# EAGLE board driverMotor (EAGLE 7.1.0)
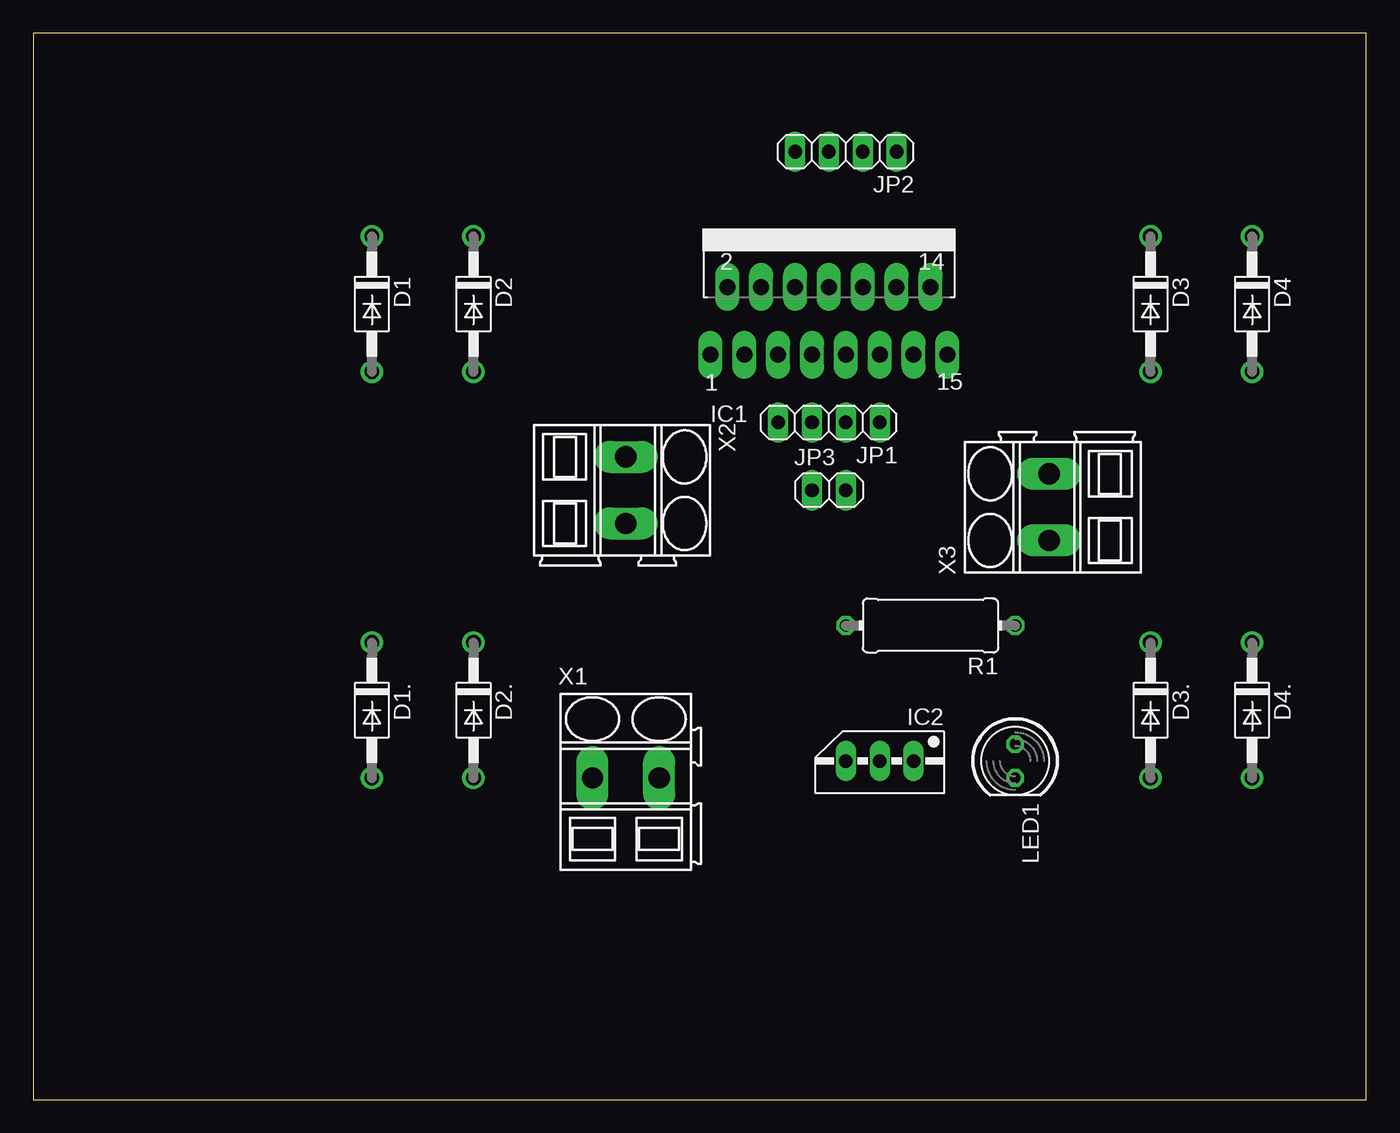
[diagram p0: board, top side]
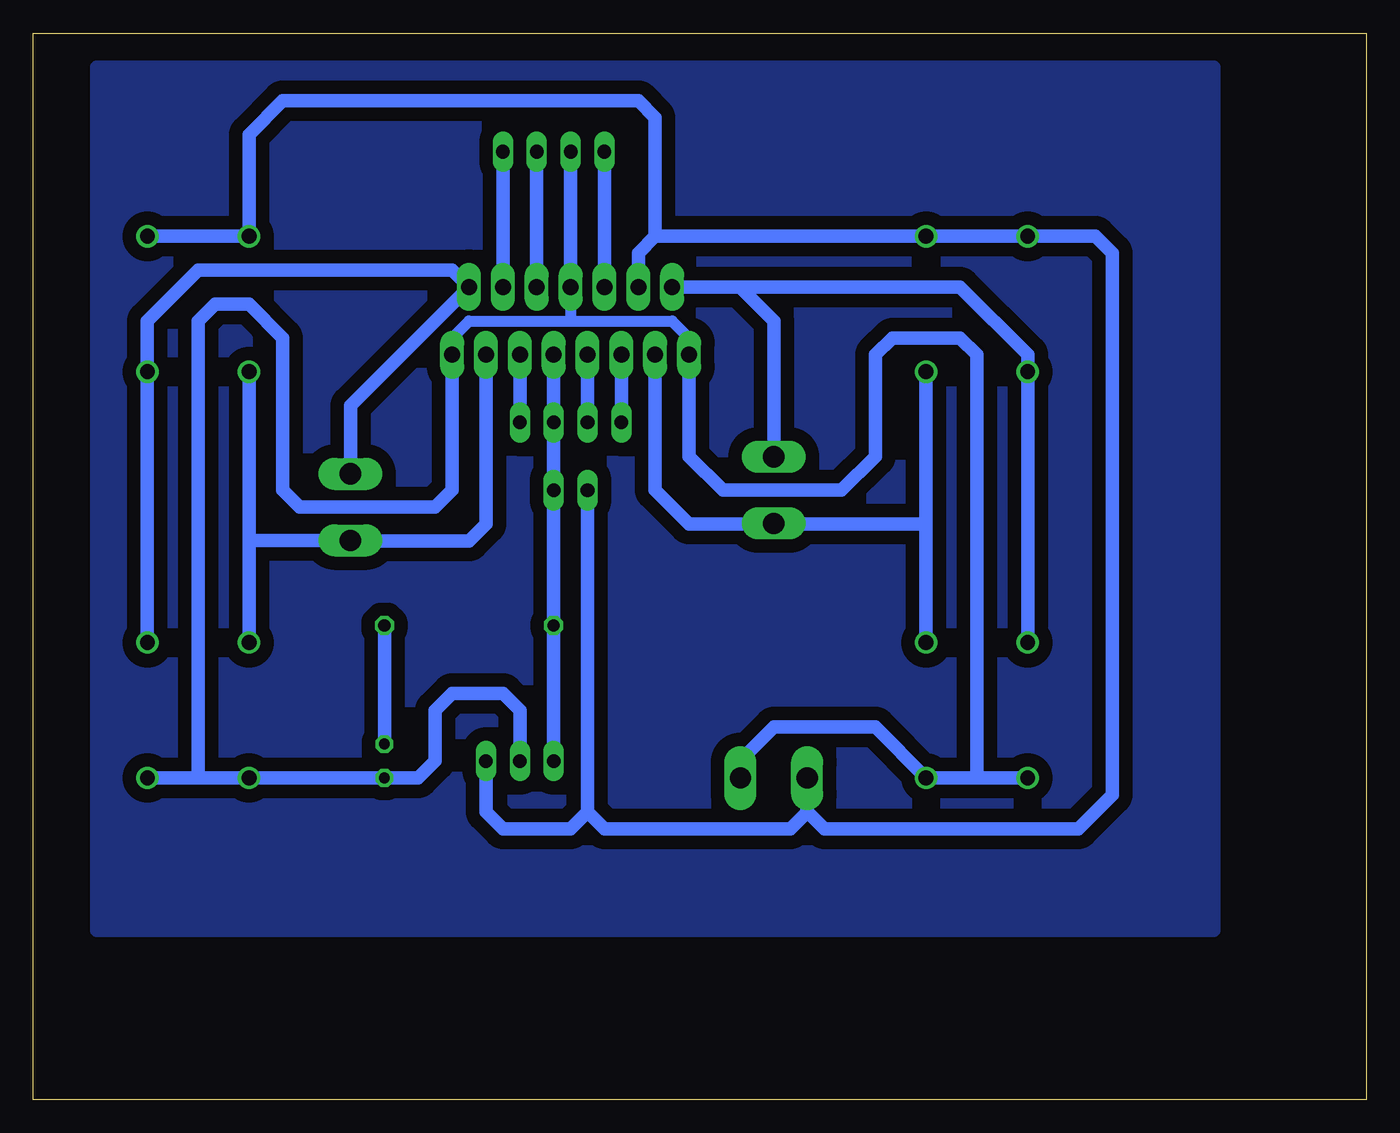
[diagram p1: board, bottom side, seen from below]

Size 100 x 80 mm. Coordinates in mm from the lower left corner, seen from the top.
Outline: 0,0 100,0 100,80 0,80 0,0
Copper layers (1*16): Top 0.035mm / dielectric 1.5mm / Bottom 0.035mm
Design rules "default": minimum track width 10mil, minimum drill 24mil, track to track 8mil, track to pad 8mil, pad to pad 8mil, via to via 8mil, smd to smd 8mil, copper to edge 40mil, drill to drill 8mil, minimum pad ring 10mil, minimum via ring 8mil, stop-mask expansion 4mil, vias tented up to drill 0mil, thermal gap 10mil

## Footprints (pad centres in the part's own frame; a part is rotated, then mirrored left to right if it is on the bottom)
DO41-10 = drill 1.118: A 5.08,0; C -5.08,0
MULTIWATT-15 = drill 1.2 long: 1 -8.89,-7.62; 2 -7.62,-2.54; 3 -6.35,-7.62; 4 -5.08,-2.54; 5 -3.81,-7.62; 6 -2.54,-2.54; 7 -1.27,-7.62; 8 0,-2.54; 9 1.27,-7.62; 10 2.54,-2.54; 11 3.81,-7.62; 12 5.08,-2.54; 13 6.35,-7.62; 14 7.62,-2.54; 15 8.89,-7.62
78MXXS = drill 1.016 long: GND 0,-2.54; IN -2.54,-2.54; OUT 2.54,-2.54
1X04 = drill 1.016 long: 1 -3.81,0; 2 -1.27,0; 3 1.27,0; 4 3.81,0
1X02 = drill 1.016 long: 1 -1.27,0; 2 1.27,0
LED5MM = drill 0.813 octagon: A -1.27,0; K 1.27,0
0411/12 = drill 0.914 octagon: 1 -6.35,0; 2 6.35,0
SMKDSP_1,5/2 = drill 1.6 pad 1.8 long: 1 -2.5,0; 2 2.5,0

## Placement (x,y rotation side)
D1  1N4004  [DO41-10]  25.4,59.69 270 top
D1.  1N4004  [DO41-10]  25.4,29.21 270 top
D2  1N4004  [DO41-10]  33.02,59.69 270 top
D2.  1N4004  [DO41-10]  33.02,29.21 270 top
D3  1N4004  [DO41-10]  83.82,59.69 270 top
D3.  1N4004  [DO41-10]  83.82,29.21 270 top
D4  1N4004  [DO41-10]  91.44,59.69 270 top
D4.  1N4004  [DO41-10]  91.44,29.21 270 top
IC1  L298  [MULTIWATT-15]  59.69,63.5 0 top
IC2  [78MXXS]  63.5,22.86 180 top
JP1  [1X04]  59.69,50.8 180 top
JP2  [1X04]  60.96,71.12 180 top
JP3  [1X02]  59.69,45.72 0 top
LED1  [LED5MM]  73.66,25.4 270 top
R1  [0411/12]  67.31,35.56 180 top
X1  SMKDSP_1,5/2  [SMKDSP_1,5/2]  44.45,24.13 0 top
X2  SMKDSP_1,5/2  [SMKDSP_1,5/2]  44.45,45.72 270 top
X3  SMKDSP_1,5/2  [SMKDSP_1,5/2]  76.2,44.45 90 top

## Library data of the parts
D1 D1. D2 D2. D3 D3. D4 D4. = diode
IC1 = st-microelectronics
IC2 = v-reg
JP1-JP3 = pinhead
LED1 = led
R1 = resistor
X1-X3 = con-phoenix-smkdsp; MF: FARNELL; MPN: 1733570; OC_FARNELL: 3041244; OC_NEWARK: 69C8588

## Nets
+5V: IC1.9 IC2.OUT JP1.2 JP3.2 R1.2
ENABLE_A: IC1.6 JP2.4
ENABLE_B: IC1.11 JP1.1
GND: D1..A D2..A D3..A D4..A IC1.1 IC1.8 IC1.15 IC2.GND JP2.3 LED1.K X1.2
INPUT1: IC1.5 JP1.4
INPUT2: IC1.7 JP1.3
INPUT3: IC1.10 JP2.2
INPUT4: IC1.12 JP2.1
LED: LED1.A R1.1
MOTOR1_1: D1..C D1.A IC1.2 X2.1
MOTOR1_2: D2..C D2.A IC1.3 X2.2
MOTOR2_1: D3..C D3.A IC1.13 X3.1
MOTOR2_2: D4..C D4.A IC1.14 X3.2
VS: D1.C D2.C D3.C D4.C IC1.4 IC2.IN JP3.1 X1.1

## Tracks (layer width: path | path; a pad name or v marks a point on that pad's centre or on a via)
+5V
  Bottom 1.016: IC1.9 JP1.2 JP3.2 R1.2 IC2.OUT
ENABLE_A
  Bottom 1.016: JP2.4 IC1.6
ENABLE_B
  Bottom 1.016: IC1.11 JP1.1
GND
  Bottom 0.813: IC1.15 68.58,57.15 67.31,58.42 59.69,58.42 | 59.69,58.42 52.07,58.42 50.8,57.15 IC1.1 | IC1.8 59.69,58.42
  Bottom 1.016: JP2.3 IC1.8 | IC2.GND 63.5,29.21 64.77,30.48 68.58,30.48 69.85,29.21 69.85,25.4 71.12,24.13 LED1.K D3..A 87.63,24.13 | X1.2 46.95,25.44 44.45,27.94 36.83,27.94 D2..A 29.21,24.13 | 29.21,24.13 D1..A | D4..A 87.63,24.13 | IC1.15 68.58,45.72 69.85,44.45 80.01,44.45 81.28,45.72 81.28,57.15 83.82,59.69 86.36,59.69 87.63,58.42 87.63,24.13 | 29.21,24.13 29.21,55.88 30.48,57.15 35.56,57.15 36.83,55.88 36.83,48.26 39.37,45.72 48.26,45.72 50.8,48.26 IC1.1
INPUT1
  Bottom 1.016: IC1.5 JP1.4
INPUT2
  Bottom 1.016: IC1.7 JP1.3
INPUT3
  Bottom 1.016: JP2.2 IC1.10
INPUT4
  Bottom 1.016: JP2.1 IC1.12
LED
  Bottom 1.016: LED1.A R1.1
MOTOR1_1
  Bottom 1.016: D1.A D1..C 25.4,55.88 30.48,60.96 46.99,60.96 | IC1.2 46.99,60.96 | 46.99,60.96 44.45,58.42 X2.1
MOTOR1_2
  Bottom 1.016: IC1.3 53.34,45.72 50.8,43.18 44.49,43.18 | 44.49,43.18 X2.2 | D2.A 33.02,43.18 | 33.02,43.18 D2..C | 44.49,43.18 33.02,43.18
MOTOR2_1
  Bottom 1.016: IC1.13 66.04,43.18 67.31,41.91 76.16,41.91 X3.1 83.78,41.95 83.82,41.91 | D3.A 83.82,41.91 | 83.82,41.91 D3..C
MOTOR2_2
  Bottom 1.016: D4..C D4.A 91.44,58.42 87.63,62.23 68.58,62.23 IC1.14 76.2,52.07 X3.2
N$1
  pour Bottom (isolate 1.016): 11.43,77.47 11.43,12.7 95.25,12.7 95.25,77.47
VS
  Bottom 1.016: 58.42,21.59 59.69,20.32 64.77,20.32 66.04,21.59 IC2.IN | X1.1 41.95,21.55 | 41.95,21.55 43.18,20.32 57.15,20.32 58.42,21.59 | 53.34,64.77 D2.C D1.C 20.32,64.77 19.05,63.5 19.05,22.86 21.59,20.32 40.64,20.32 41.91,21.59 | IC1.4 54.61,63.5 53.34,64.77 | 53.34,64.77 53.34,73.66 54.61,74.93 81.28,74.93 83.82,72.39 D3.C D4.C | JP3.1 58.42,21.59 | 41.95,21.55 41.91,21.59 | 41.91,24.13 41.91,21.59